# Altium PCB PIPOCPUF_2006.PCBDOC (part 6 of 6)
Units mil, origin at the board's own origin, x right, y up, seen from the top; angles counter-clockwise.
Board outline 8500 x 4525 mil, 2 copper layers (Top Layer, Top, Bottom Layer, Bottom); 345 components, 259 nets, 1116 pads, 603 vias.
Unrouted connection lines stored in the file: 781.
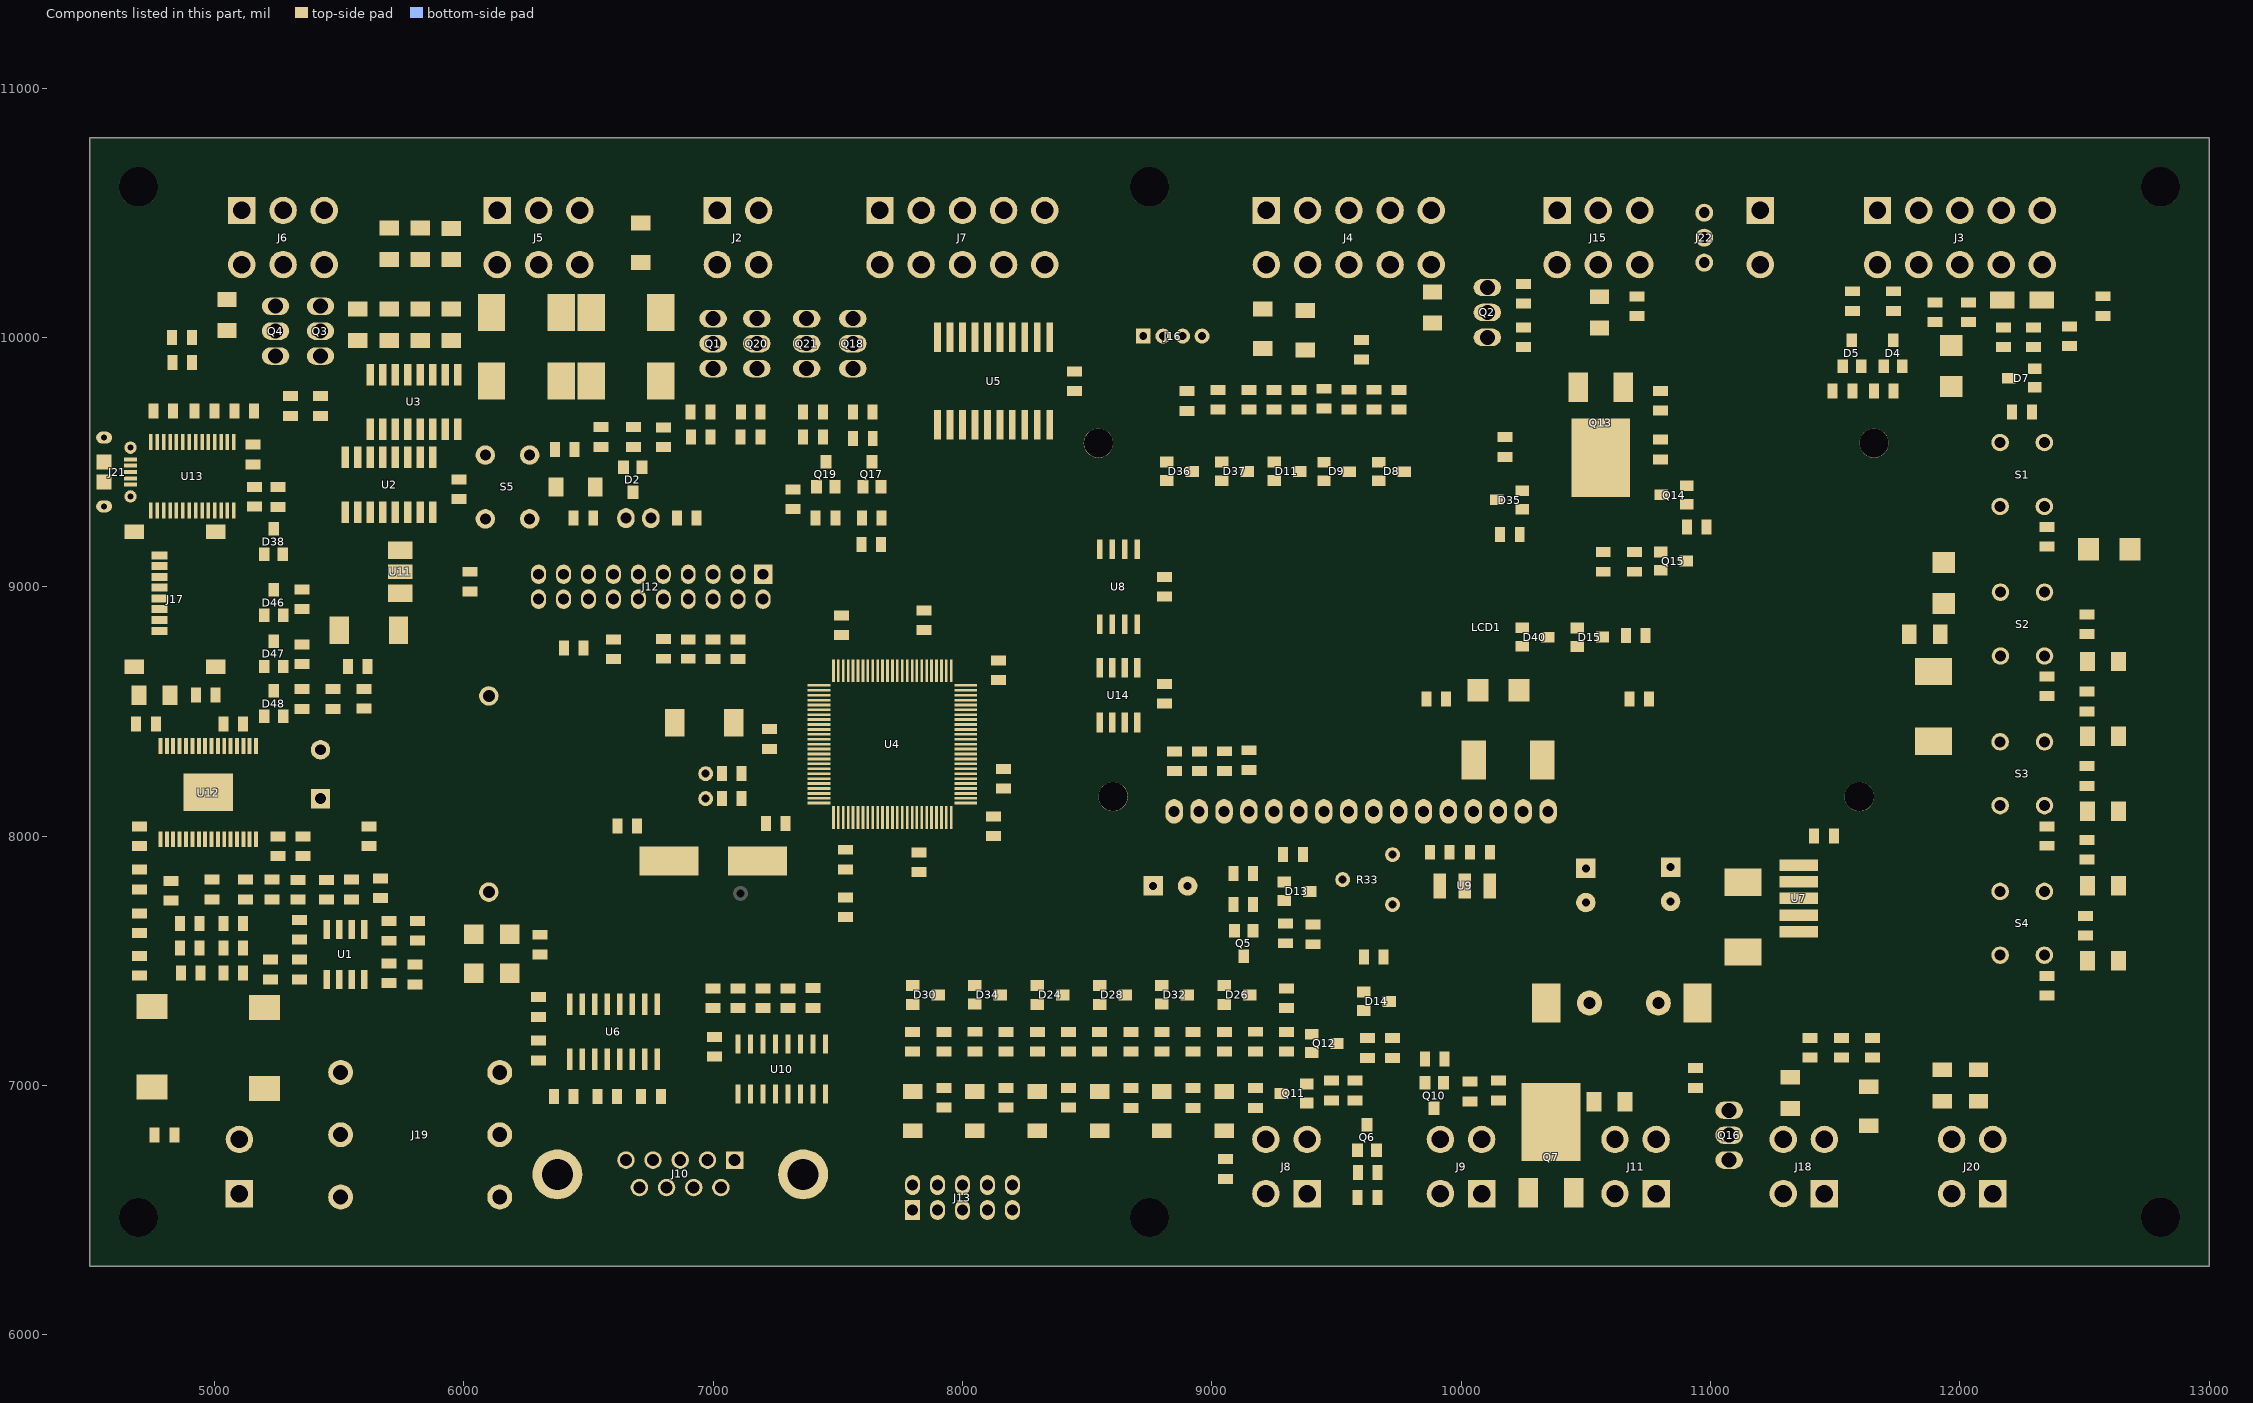
[diagram p6: the components of this part, seen from the top]

## Via types
v1: diameter 28, hole 16, Top Layer, Top to Bottom Layer, Bottom, 595 vias
v2: diameter 36, hole 24, Top Layer, Top to Bottom Layer, Bottom, 4 vias
v3: diameter 40, hole 24, Top Layer, Top to Bottom Layer, Bottom, 4 vias

## Nets (pads, with @x,y where several pads share a name; then routed paths per layer and width w, separated by ;. In a path a pad name is that pad's centre, name@x,y a point inside that pad or via, vN(x,y) a via of type N, cw(c..) or ccw(c..) an arc to the next point about the centre after c; other vN are vias at no path point) (continued)
copper on no net: (continued)
  Bottom Layer, Bottom w30: v1(4560,8530) v1(4560,8570) ; v1(4775,7680) 4795,7700 v1(4965,7700) ; v1@4885,9520 v1(5215,9520) v1(5255,9520) ; v1(5230,7700) v1(5130,7700) 4995,7700 ; 5506,6802 6128,6802 ; 5506,7052 6148,7052 6087,7052 ; 5520,6545 6140,6545 6190,6495 6445,6495 6650,6700 6655,6700 ; v1(5545,7890) 5575,7860 5665,7860 6125,7860 6255,7730 6305,7680 7380,7680 9625,7680 9675,7730 9740,7730 ; v1(5605,8445) v1(5930,8445) v1(6100,8445) ; v1(6100,8950) 6295,8950 ; v1(6180,7320) 6390,7320 6400,7310 6935,7310 6970,7275 7120,7275 7795,7275 9500,7275 9525,7250 v1(9620,7250) ; 6300,8950 6395,8950 6400,8950 6495,8950 6500,8950 6595,8950 6600,8950 6700,8950 6800,8950 6900,8950 7000,8950 7100,8950 ; v1(6790,6860) 7345,6860 v1(7350,6860) v1(7400,6860) 7445,6860 v1(7450,6860) v1(7705,6860) v1(7925,6860) ; v1(7150,8345) 7145,8250 v1(7160,8235) 7160,8155 7200,8115 7310,8115 v1(7335,8090) ; v1(7335,7825) 7400,7825 v1(7535,7825) ; 7800,6600 7750,6600 7720,6570 7720,6385 7775,6330 8455,6330 8500,6375 8500,6565 8635,6700 8905,6700 9010,6595 9010,6450 9090,6370 9420,6370 ; v1(8725,10230) 8725,10335 ; v1(10350,7645) v1(11010,7645) v1(11010,7605) ; v1@10350,7650 v1(10350,7690) ; v1(4965,7700) 4995,7700 ; v1(4965,7700) 4995,7700
  Bottom Layer, Bottom w40: v1(5930,7405) v1(5930,7450) 6285,7450 ; 6280,7450 6285,7450 ; v1@7000,7455 v1@9050,7450 ; v1@7005,7450 v1(7000,7450) 6755,7450 6340,7450 6285,7450 ; v1@7470,7725 9595,7725 9655,7785 v1@9860,7785 ; 7560,8525 7875,8525 7875,8210 ; v1(7925,6860) v1(8175,6860) v1(8425,6860) v1(9135,6860) v1@9170,6860 ; 8765,7730 8765,7800 ; 9740,7730 10335,7730 v1(10350,7730) ; v1@10195,7735 v1(10195,7765) ; 10195,7745 v1@10195,7760 ; 7875,8210 7590,8210 7560,8210 7560,8520 7565,8520 7625,8460 7630,8455 7805,8280 7875,8210
  Bottom Layer, Bottom w50: v3@4550,9600 4620,9600 4665,9555 4665,9365 4630,9330 4555,9330 v3@4555,9595 ; 5100,10505 4980,10505 4820,10345 4630,10345 4565,10280 4565,9800 4735,9630 4735,9325 4565,9160 4565,7940 4640,7865 v1(4825,7865) 4835,7875 v1(5120,7875) 5385,7875 5400,7885 v1(5435,7885) v1(5435,7915) ; 7405,7465 7430,7490 v1(7535,7490) v1@9835,7490 ; v1@9050,7450 9845,7450 v1(10180,7450) v1(10500,7450) ; v1(9730,10060) 9795,10060 9940,10060 9980,10100 10110,10100 ; 9995,9895 10035,9855 v1(10035,9850) ; v1(10005,9885) v1(10445,9885) 10475,9885 v1(10485,9885) ; 10145,8100 10250,8100 ; 10375,10480 10455,10400 10975,10400 ; v1@10505,7450 v1(10795,7450) ; 10975,10500 10975,10715
  Bottom Layer, Bottom w70: 4645,8450 4645,7985 4685,7945 5355,7945 5405,7995 5505,7995 ; 4645,8460 4645,9120 4815,9290 4815,9670 4645,9840 4645,10215 4645,10250 ; 4655,8000 5390,8000 ; 4665,8310 4930,8310 4975,8355 5275,8355 ; 4675,8060 5280,8060 ; 4675,8120 5295,8120 ; 4675,8185 5315,8185 ; 4685,8250 5350,8250 ; 4975,8310 5460,8310 ; 5115,10270 5260,10125 5420,10125 ; 5300,8355 5315,8340 5505,8340 5530,8315 5530,7995 ; 5305,8075 5335,8045 ; 5330,8075 5330,8205 5370,8245 5515,8245 ; 5360,8045 5480,8045 ; 5485,8045 5525,8085 ; 6095,9965 6245,9965 6345,10065 6770,10065 6990,10065 7010,10085 ; v1@6365,9960 v1@6490,9960 ; 6380,9725 6540,9725 6595,9780 7640,9780 7685,9825 7685,9930 7640,9975 7365,9975 ; v1(6487,9962) 6500,9975 7162,9975 ; 6630,8070 7290,8070 ; 6640,8120 6860,8120 ; 6655,8175 6885,8175 ; 6665,8225 6875,8225 ; 6665,8280 6860,8280 ; 6675,8010 7295,8010 ; 6720,7945 7275,7945 ; 6730,7880 7295,7880 ; 6770,7850 7300,7850 ; 6890,8080 6890,8315 ; 7000,10075 7095,10170 7490,10170 7560,10100 7560,10075 ; 7050,8080 7050,8330 ; 7105,8080 7105,8315 ; 7130,8335 6670,8335 6620,8285 6620,8025 6690,7955 6690,7860 6755,7795 7320,7795 7320,7865 7320,8065 ; 7135,8110 7135,8230 ; 7145,8095 7175,8095 ; 7165,10075 7175,10075 7375,10075 ; 7360,7790 7440,7790 ; 7360,7825 7360,8130 ; 10510,7740 12030,7740 12095,7675 ; 10840,7875 10920,7955 11355,7955 ; v1@12780,7575 12780,7725
  Bottom Layer, Bottom w90: 5084,10509 5084,10597 5137,10650 ; 5150,10650 6037,10650 ; 6100,10712 8400,10715 8470,10645 8470,10475 8615,10340 8895,10340 8900,10340 9035,10475 9035,10620 9025,10525 ; 6134,10509 6137,10500 6137,10650 6138,10650 6200,10712 ; 9188,10525 9020,10525 9020,10650 9100,10725 11675,10725 ; 9382,6566 9382,6430 9450,6362 ; 10775,6362 10775,6537 10782,6566 ; 11462,6362 11462,6550 ; 12137,6362 12137,6549 ; 10082,6367 10082,6566 10087,6537 10087,6362 10082,6367
  Bottom Layer, Bottom w120: v1@4675,10245 4920,10245 4965,10290 5110,10290 ; 7185,10300 7230,10300 7340,10410 7340,10545 7440,10545 ; v1@7620,8455 7625,8455 ; v1@7625,8460 7625,8455 ; 9385,6420 9430,6375 12450,6375 12512,6437 12512,6600 12662,6750 12825,6750 12900,6825 12900,10224 12812,10312 12675,10312 12512,10475 12512,10625 12425,10710 11670,10710 11670,10515 ; v1@12070,7655 12765,7655 ; 7625,8455 7630,8455 7825,8455 7825,8280 7805,8280 7625,8280 7625,8455
  other v1: 7800,7275 8300,7275 8550,7275 9050,7275 8050,7276 8800,7276 6405,7455 9835,7455 6780,7460 6895,7460 7250,7460 7045,7465 8095,7485 8180,7485 9835,7495 12785,7575 12060,7620 12100,7620 12785,7620 12800,7655 12060,7660 12100,7660 12060,7700 12100,7700 12790,7700 10165,7730 12785,7745 6580,7750 9800,7785 9835,7785 11325,7940 11365,7940 11325,7980 11360,7980 5820,8040 10885,8125 7590,8166 11255,8230 10835,8255 7615,8265 7665,8265 7715,8265 7765,8265 7815,8265 7615,8315 7665,8315 7715,8315 7765,8315 7815,8315 7615,8365 7665,8365 7715,8365 7765,8365 7815,8365 9320,8395 9605,8395 9690,8395 11265,8395 10815,8400 9215,8405 7615,8415 7665,8415 7715,8415 7765,8415 7815,8415 4928,8432 9105,8440 9005,8450 7615,8465 7665,8465 7715,8465 7765,8465 7815,8465 7205,8535 6585,8560 7830,8570 6310,8575 5135,8735 4825,8740 6150,8795 9980,8865 5110,8890 8040,8910 5465,8930 5370,9140 5010,9160 5465,9165 5610,9165 5370,9275 5460,9290 7940,9295 9305,9300 9970,9310 11350,9340 7140,9345 11120,9365 9455,9378 9675,9378 9045,9379 9255,9379 8829,9380 5660,9385 6980,9415 8725,9450 11120,9580 10210,9680 6387,9712 6425,9712 6462,9712 6500,9712 6075,9962 6112,9962 6150,9962 6187,9962 6375,9962 6412,9962 6450,9962 4675,10250 4720,10250 4760,10250 4800,10250 4655,10280 4820,10280 7335,10535 7375,10535 7415,10535 7455,10535 7375,10580 7415,10580 7455,10580
  other v2: 4663,9355 4663,9369 4663,9551 4663,9565
  other v3: 4545,9322 4569,9322 4545,9598 4569,9598

## Keep-outs
Keep-Out Layer, Board:
  lines w8: 4500,6275 13000,6275 ; 4500,6275 4500,10800 ; 4500,6275 13000,6275 ; 4500,6275 4500,10800 ; 4500,10800 13000,10800 ; 4500,10800 13000,10800 ; 13000,6275 13000,10800 ; 13000,6275 13000,10800

## Other copper
Top Layer, Top:
  region: 7805,8280 7805,8455 7630,8455 7630,8280
  text "F.Comp" at 12322,6535 h49.38 r90
  text "090909" at 12402,6530 h49.38 r90
Bottom Layer, Bottom:
  region: 7580,8230 7855,8230 7855,8505 7580,8505
  text "101010" at 12728,8160 h49.38 r270
  text "F.Solda" at 12733,7830 h49.38 r270
  text "GA0072" at 12050,7124 h75.62
  text "CPU Mais Pipoca Geracao 2" at 12605,6984 h75.62

## Silkscreen, mask and mechanical layers (free items; w line width, h text height)
Top Overlay, Top Silk:
  lines w20: 6675,10615 6685,10615 6695,10605
  text "CAO" at 6692,10585 h64.38 r90
  text "12V" at 10905,10405 h45.62 r90
  text "STRIP" at 5037,10285 h64.38 r90
  text "CUPULA" at 7432,10250 h64.38 r90
  text "24V" at 10905,10240 h45.62 r90
  text "INSTRU" at 6667,10235 h64.38 r90
  text "POTENCIA" at 12572,10230 h64.38 r90
  text "EMBALAGEM" at 9067,10120 h64.38 r90
  text "EXTERNO" at 8050,10113 h64.38
  text "LCD" at 7810,10108 h64.38
  text "ESC" at 11890,9367 h80
  text ">" at 12189,8775 h140.62 r90
  text "RUN" at 12735,8638 h64.38
  text "VIN" at 12745,8358 h64.38
  text "<" at 12169,8165 h140.62 r90
  text "5V" at 12755,8048 h64.38
  text "3,3V" at 12730,7748 h64.38
  text "GA0072" at 8040,7656 h83.75
  text "3,3" at 12745,7438 h64.38
  text "ENTER" at 11880,7347 h80
  text "VA" at 12770,7338 h64.38
  text "ALTO" at 4780,6673 h49.38
  text "FALANTE" at 4720,6598 h49.38
  text "P70" at 9847,6575 h64.38 r90
  text "CCTALK" at 10957,6540 h64.38 r90
  text "GRATIS" at 11696,6450 h60.62 r90
  text "UCA1" at 9087,6315 h64.38 r90
  text "RM5" at 6745,6288 h64.38
Drill Drawing, Drill:
  lines w16: 7385,13948 9096,13948 ; 7385,14114 9096,14114 ; 7514,13367 7614,13367 ; 7514,13583 7564,13533 ; 7514,13649 7614,13749 ; 7514,13749 7614,13649 ; 7514,13865 7614,13865 ; 7539,12396 7564,12371 7589,12396 ; 7564,12703 7564,12753 ; 7564,12869 7564,12919 ; 7564,13317 7564,13367 ; 7564,13483 7564,13533 ; 7564,13815 7564,13915 ; 7614,13583 7564,13533 ; 7744,12288 7744,14114 ; 8298,12288 8298,14114 ; 7514,12587 7564,12537 7614,12587 ; 7514,12587 7514,12487 7614,12487 7614,12587 ; 7514,12587 7614,12587 ; 7564,12753 7514,12703 7564,12653 7614,12703 7564,12753 ; 7385,12288 9096,12288 9096,14280 7385,14280 7385,12288 ; 7514,12371 7564,12321 7614,12371 7564,12421 7514,12371 ; 7514,12819 7514,12919 7614,12919 7614,12819 7514,12819 ; 7514,12985 7614,13085 7614,12985 7514,13085 7514,12985 ; 7514,13151 7614,13251 7514,13251 7614,13151 7514,13151
  text "GA0072  215,9 x 114,9 mm" at 7515,14138 h64.38
  text "SYM" at 7416,13948 h95
  text "COUNT" at 7775,13948 h95
  text "SIZE(mm)" at 8327,13948 h95
  text "595" at 7980,13782 h95
  text "0.41" at 8613,13782 h95
  text "12" at 8076,13616 h95
  text "0.61" at 8613,13616 h95
  text "16" at 8076,13450 h95
  text "0.81" at 8613,13450 h95
  text "73" at 8076,13284 h95
  text "1.12" at 8613,13284 h95
  text "13" at 8076,13118 h95
  text "1.22" at 8613,13118 h95
  text "30" at 8076,12952 h95
  text "1.52" at 8613,12952 h95
  text "76" at 8076,12786 h95
  text "1.78" at 8613,12786 h95
  text "4" at 8171,12620 h95
  text "2.97" at 8613,12620 h95
  text "2" at 8171,12454 h95
  text "3.15" at 8613,12454 h95
  text "6" at 8171,12288 h95
  text "3.99" at 8613,12288 h95
  text "Observar rasgos em J21" at 7390,12041 h83.75
  text "Placa Face Dupla, e=1,6mm; 0,5 Ozft2" at 7125,11889 h75.62

## Text inside footprints (layer, text, board x,y; h text height)
C36: Top Overlay, Top Silk "+" at 10284,7960 h60.62 r270
C38: Top Overlay, Top Silk "+" at 10909,7990 h60.62 r270
C40: Top Overlay, Top Silk "+" at 8612,7743 h60.62
C54: Top Overlay, Top Silk "+" at 5469,8871 h49.38
C56: Top Overlay, Top Silk "+" at 6715,8438 h49.38
J17: Top Overlay, Top Silk "CARTAO" at 4554,9046 h30 r270
J19: Top Overlay, Top Silk "-->" at 5882,6425 h83.75 r90; Top Overlay, Top Silk "borda da placa" at 5607,6283 h37.5